# EAGLE board Control (EAGLE 9.5.2)
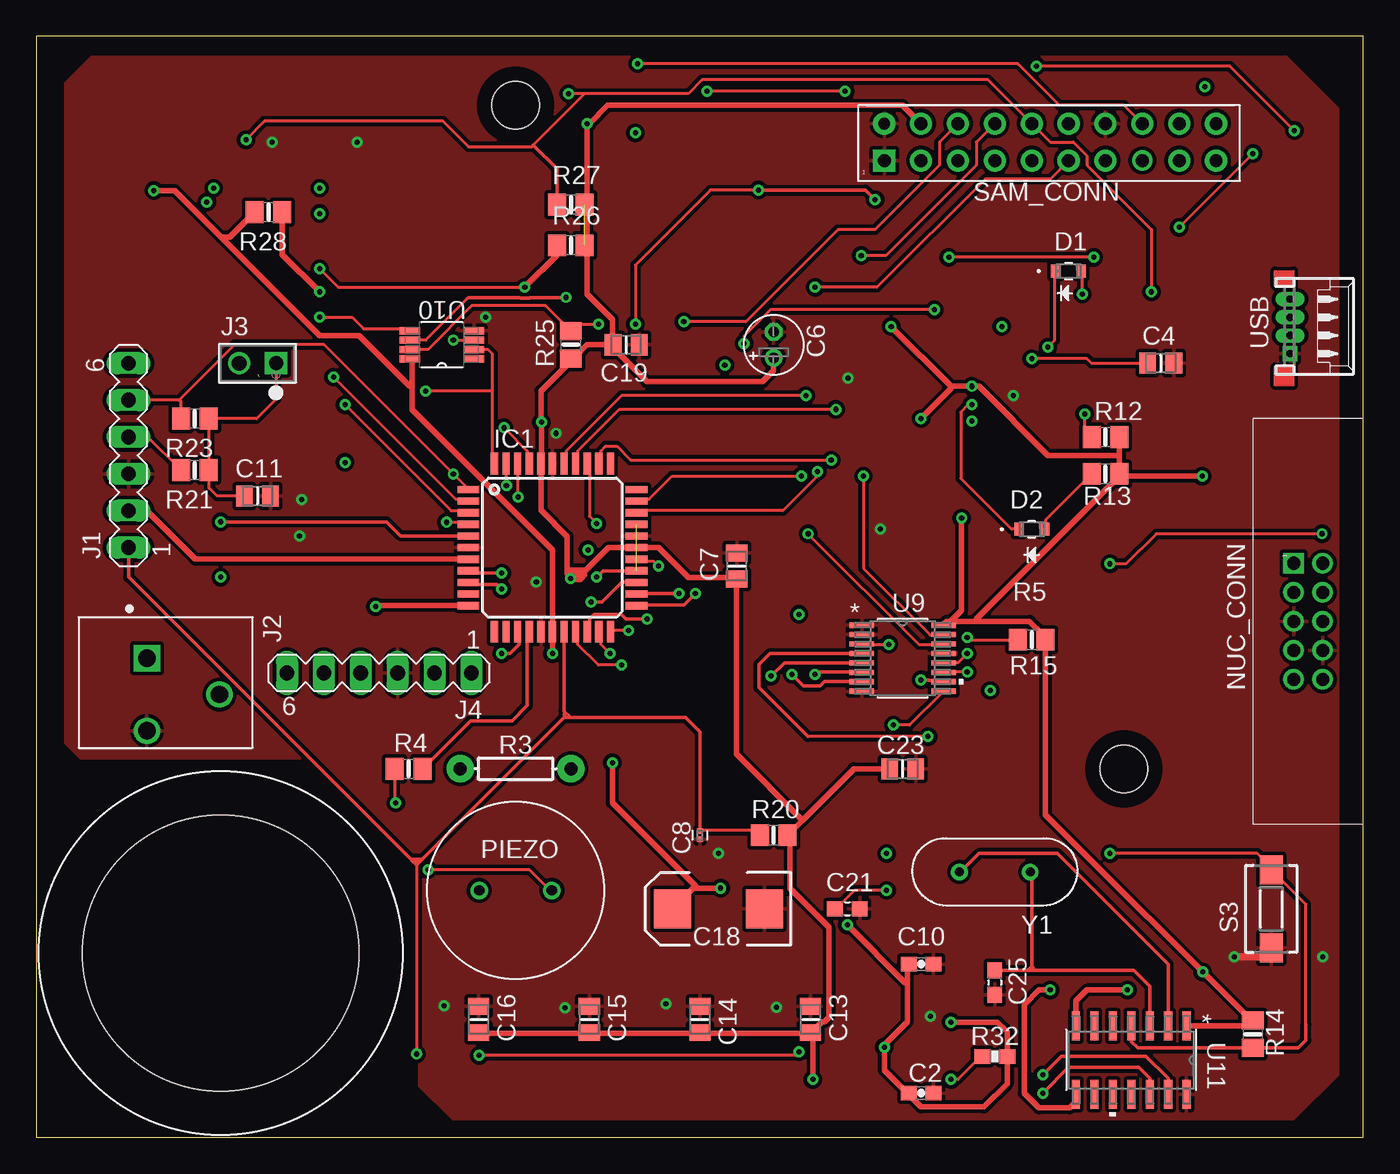
[diagram p0: board, top side]
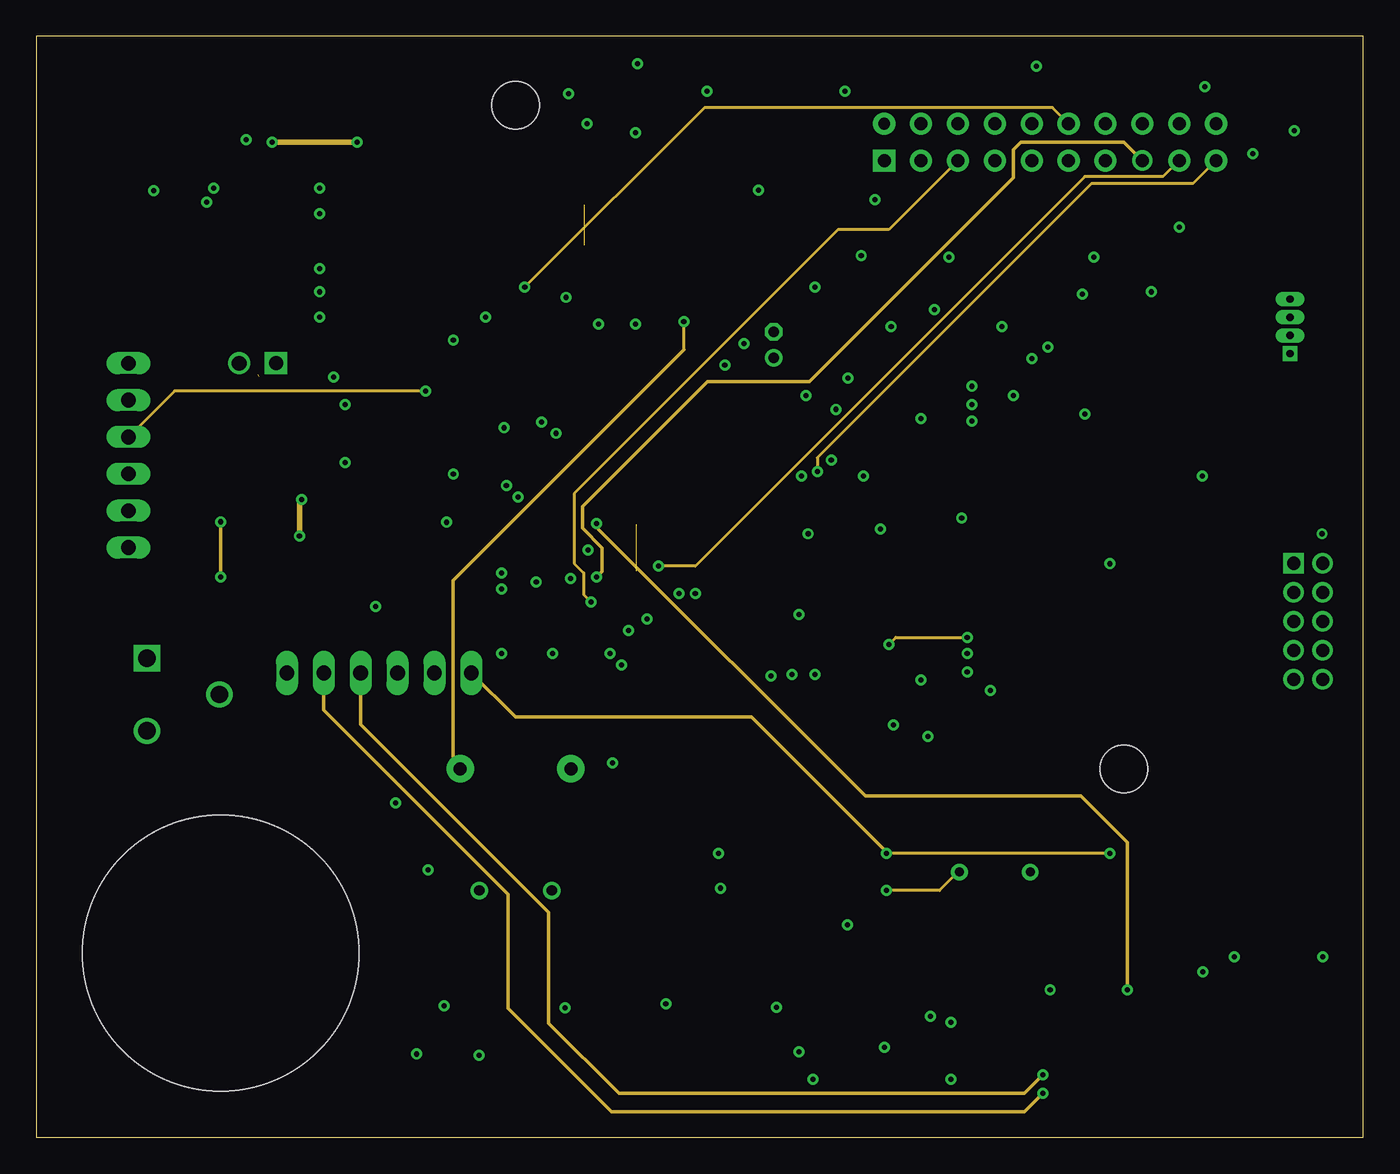
[diagram p1: board, inner layer Route2]
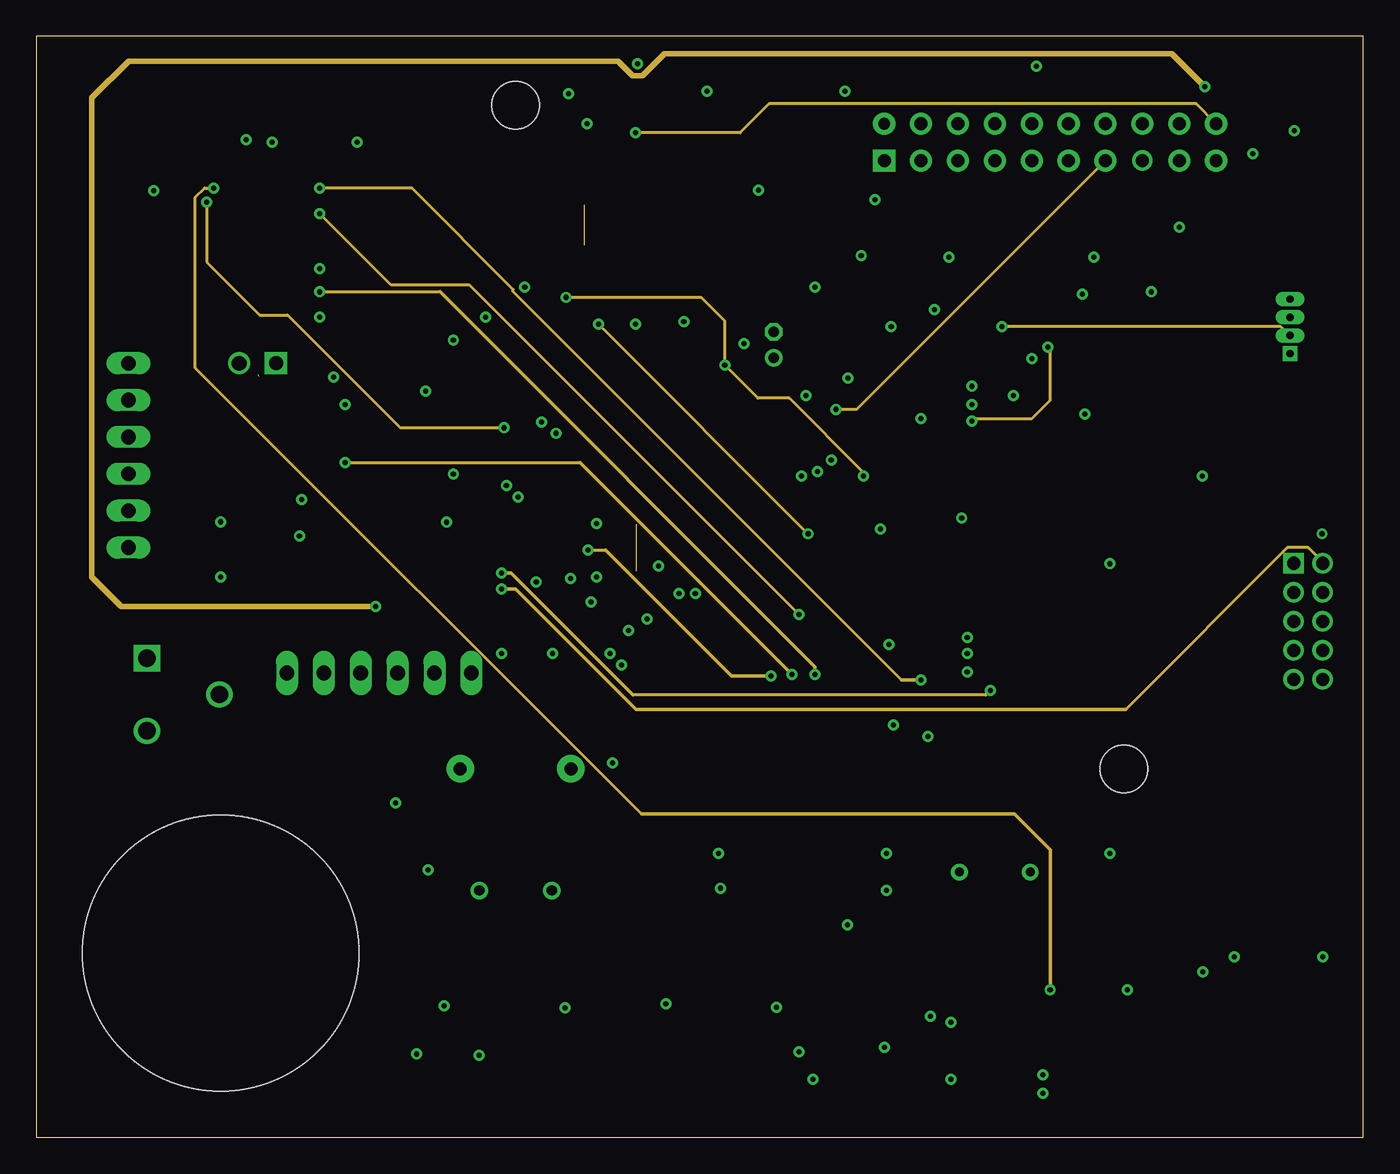
[diagram p2: board, inner layer Route15]
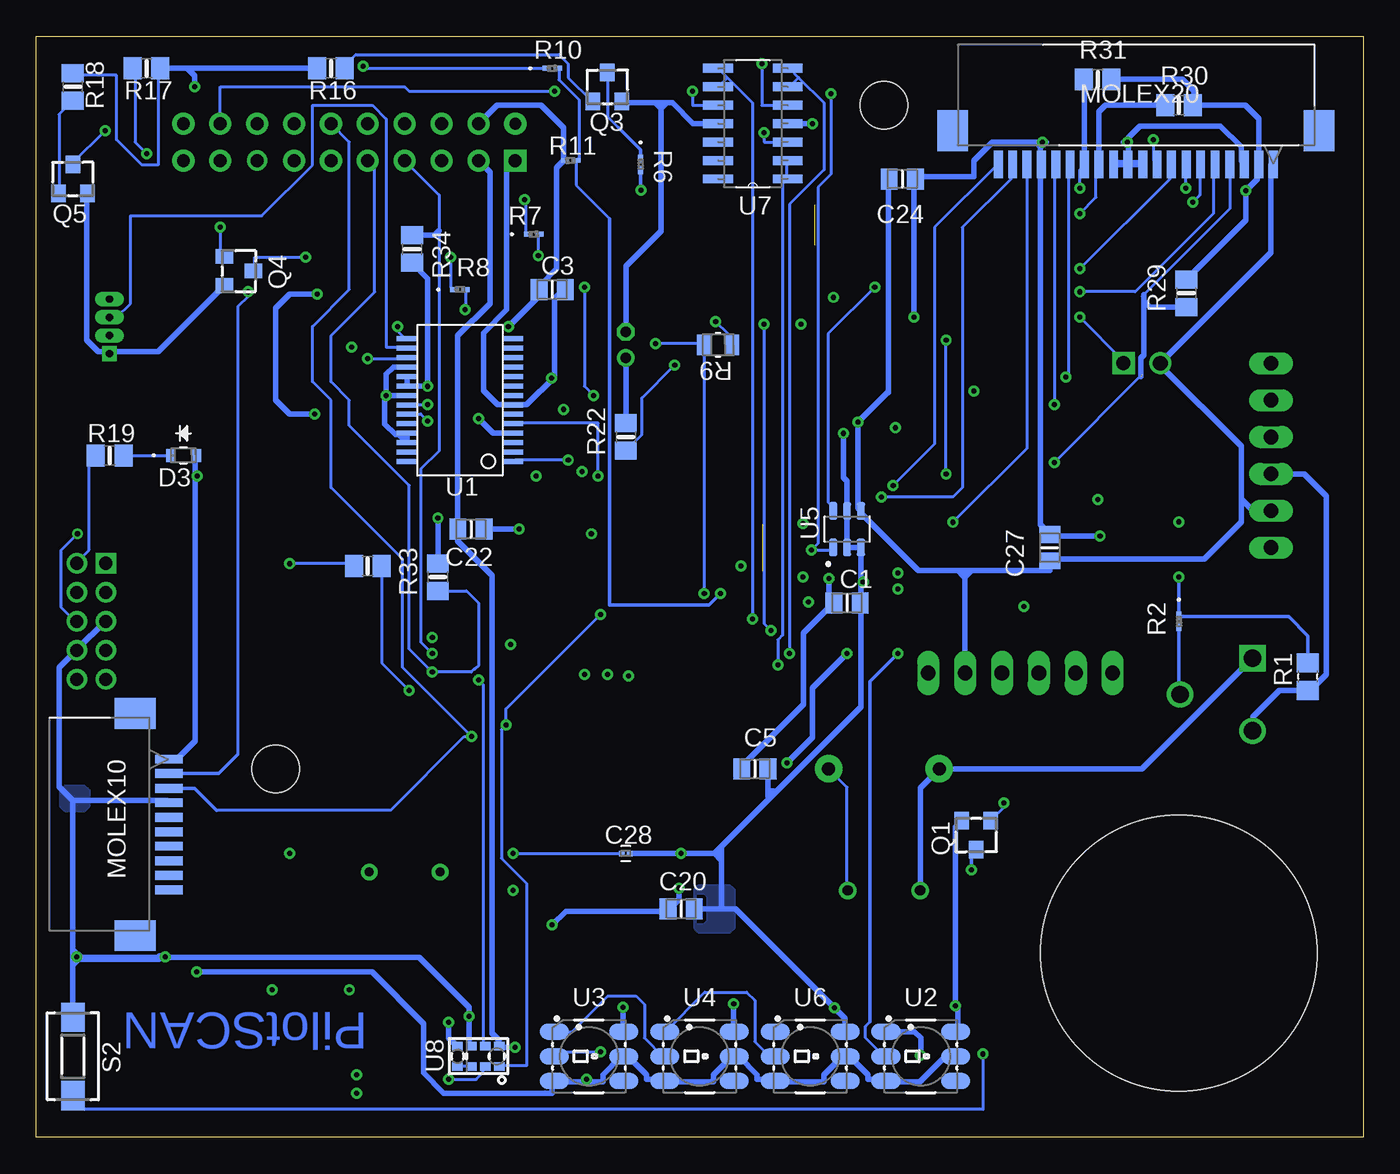
[diagram p3: board, bottom side, seen from below]

Size 91.42 x 75.87 mm. Coordinates in mm from the lower left corner, seen from the top.
Outline: 0,0 91.42,0 91.42,75.87 0,75.87 0,0
Copper layers (1+2*15+16): Top 0.035mm / dielectric 1.5mm / Route2 0.035mm / dielectric 0.15mm / Route15 0.035mm / dielectric 0.2mm / Bottom 0.035mm
Design rules "default *": minimum track width 6mil, minimum drill 0.35mm, track to track 6mil, track to pad 6mil, pad to pad 6mil, via to via 6mil, smd to smd 6mil, copper to edge 40mil, drill to drill 6mil, minimum pad ring 10mil, minimum via ring 8mil, stop-mask expansion 4mil, vias tented up to drill 0mil, thermal gap 10mil
Net classes: 0 default: width 0.203 mm, clearance 0.254 mm; 1 power: width 0.381 mm, clearance 0.254 mm
Holes 19.02 mm at 12.7,12.7
Holes 3.28 mm at 33.02,71.12 74.93,25.4

## Footprints (pad centres in the part's own frame; a part is rotated, then mirrored left to right if it is on the bottom)
PS1240P02BT = drill 0.7: P$1 -2.5,0; P$2 2.5,0
CAPC2012X140N = smd 1.15 x 1.45: 1 -0.9,0; 2 0.9,0
0603-CAP = smd 1.1 x 1: 1 -0.85,0; 2 0.85,0
E1,8-4 = drill 0.711 pad 1.168: + -0.889,0 | drill 0.711 pad 1.168 octagon: - 0.889,0
CL03A104KQ3NNNC = smd 0.38 x 0.4: 1 -0.281,0; 2 0.281,0
EIA7343 = smd 2.55 x 2.7: A 3.17,0; C -3.17,0
CAPC1608X90 = smd 1.1 x 1: 1 -0.85,0; 2 0.85,0
LED_VISHAY_TLMX1100 = smd 0.66 x 0.889: 1 -0.876,0; 2 0.876,0
TQFP44 = smd 1.5 x 0.5: 1 -5.8,4; 2 -5.8,3.2; 3 -5.8,2.4; 4 -5.8,1.6; 5 -5.8,0.8; 6 -5.8,0; 7 -5.8,-0.8; 8 -5.8,-1.6; 9 -5.8,-2.4; 10 -5.8,-3.2; 11 -5.8,-4; 23 5.8,-4; 24 5.8,-3.2; 25 5.8,-2.4; 26 5.8,-1.6; 27 5.8,-0.8; 28 5.8,0; 29 5.8,0.8; 30 5.8,1.6; 31 5.8,2.4; 32 5.8,3.2; 33 5.8,4 | smd 0.5 x 1.5: 12 -4,-5.8; 13 -3.2,-5.8; 14 -2.4,-5.8; 15 -1.6,-5.8; 16 -0.8,-5.8; 17 0,-5.8; 18 0.8,-5.8; 19 1.6,-5.8; 20 2.4,-5.8; 21 3.2,-5.8; 22 4,-5.8; 34 4,5.8; 35 3.2,5.8; 36 2.4,5.8; 37 1.6,5.8; 38 0.8,5.8; 39 0,5.8; 40 -0.8,5.8; 41 -1.6,5.8; 42 -2.4,5.8; 43 -3.2,5.8; 44 -4,5.8
MA06-1 = drill 1.016 long: 1 -6.35,0; 2 -3.81,0; 3 -1.27,0; 4 1.27,0; 5 3.81,0; 6 6.35,0
CONN_1-2834021-3 = drill 1.2 square: 1 0,0 | drill 1.2: 2 2.5,5; 3 5,0
77311-118-02LF = drill 0.965 pad 1.524 square: 1 2.54,0 | drill 1.016 pad 1.524: 2 0,0
522071060 = smd 0.61 x 1.905: 1 6.502,4.801; 2 5.512,4.801; 3 4.496,4.801; 4 3.505,4.801; 5 2.489,4.801; 6 1.499,4.801; 7 0.508,4.801; 8 -0.508,4.801; 9 -1.499,4.801; 10 -2.489,4.801 | smd 2.108 x 2.794: Z1 -5.642,7.137; Z2 9.652,7.137
XF3M(1)-2015-1B = smd 0.61 x 1.905: 1 6.502,4.801; 2 5.512,4.801; 3 4.496,4.801; 4 3.505,4.801; 5 2.489,4.801; 6 1.499,4.801; 7 0.508,4.801; 8 -0.508,4.801; 9 -1.499,4.801; 10 -2.489,4.801; 11 -3.505,4.801; 12 -4.496,4.801; 13 -5.512,4.801; 14 -6.502,4.801; 15 -7.493,4.801; 16 -8.484,4.801; 17 -9.474,4.801; 18 -10.465,4.801; 19 -11.455,4.801; 20 -12.446,4.801 | smd 2.108 x 2.794: 21 -15.596,7.137; 22 9.652,7.137
332-10 = drill 0.9 pad 1.27 square: 1 -4,-1 | drill 0.9 pad 1.27: 2 -4,1; 3 -2,-1; 4 -2,1; 5 0,-1; 6 0,1; 7 2,-1; 8 2,1; 9 4,-1; 10 4,1
MMBTA13LT3G = smd 1 x 1.2: A -1,-1; C 0,1; NC 1,-1
RESC2012X60 = smd 1.3 x 1.5: 1 -0.95,0; 2 0.95,0
RES_RC0201_P6XP3 = smd 0.559 x 0.33: 1 -0.394,0; 2 0.394,0
AXIAL-0.3 = drill 0.9 pad 1.88: P$1 -3.81,0; P$2 3.81,0
RMCF0805JT270R = smd 1.24 x 1.5: 1 -0.95,0; 2 0.95,0
RMCF0805FT1K00 = smd 1.24 x 1.5: 1 -0.95,0; 2 0.95,0
RES0805_CRG_TYCO = smd 0.965 x 1.397: 1 -0.953,0; 2 0.953,0
YAG_R0201 = smd 0.559 x 0.33: 1 -0.394,0; 2 0.394,0
RMCF0805FT2K20 = smd 1.24 x 1.5: 1 -0.95,0; 2 0.95,0
0603-RES = smd 1.1 x 1: 1 -0.85,0; 2 0.85,0
DTSM-3 = smd 2 x 1.6: 1 -2.7,0; 2 2.7,0
IPT1-110-01-L-D = drill 0.889 pad 1.524 square: P$1 -8.89,5.08 | drill 0.813 pad 1.524: P$2 -8.89,7.62 | drill 0.889 pad 1.524: P$3 -6.35,5.08; P$4 -6.35,7.62; P$5 -3.81,5.08; P$6 -3.81,7.62; P$7 -1.27,5.08; P$8 -1.27,7.62; P$9 1.27,5.08; P$10 1.27,7.62; P$11 3.81,5.08; P$12 3.81,7.62; P$13 6.35,5.08; P$14 6.35,7.62; P$16 8.89,7.62; P$17 11.43,5.08; P$18 11.43,7.62; P$19 13.97,5.08; P$20 13.97,7.62 | drill 0.889: P$15 8.89,5.08
SSOP28DB = smd 0.348 x 1.397: 1 -4.225,-3.656; 2 -3.575,-3.656; 3 -2.925,-3.656; 4 -2.275,-3.656; 5 -1.625,-3.656; 6 -0.975,-3.656; 7 -0.325,-3.656; 8 0.325,-3.656; 9 0.975,-3.656; 10 1.625,-3.656; 11 2.275,-3.656; 12 2.925,-3.656; 13 3.575,-3.656; 14 4.225,-3.656; 15 4.225,3.656; 16 3.575,3.656; 17 2.925,3.656; 18 2.275,3.656; 19 1.625,3.656; 20 0.975,3.656; 21 0.325,3.656; 22 -0.325,3.656; 23 -0.975,3.656; 24 -1.625,3.656; 25 -2.275,3.656; 26 -2.925,3.656; 27 -3.575,3.656; 28 -4.225,3.656
LED-TRICOLOR-5050-IC = smd 2 x 1.1: 1 -2.4,1.7; 2 -2.4,0; 3 -2.4,-1.7; 4 2.4,-1.7; 5 2.4,0; 6 2.4,1.7
TMP100NA/3K = smd 1.21 x 0.58: 1 -1.255,0.95; 2 -1.255,0; 3 -1.255,-0.95; 4 1.255,-0.95; 5 1.255,0; 6 1.255,0.95
SOIC127P600X175-14N = smd 2.057 x 0.61: 1 -4.801,7.62; 2 -4.801,6.35; 3 -4.801,5.08; 4 -4.801,3.81; 5 -4.801,2.54; 6 -4.801,1.27; 7 -4.801,0; 8 0,0; 9 0,1.27; 10 0,2.54; 11 0,3.81; 12 0,5.08; 13 0,6.35; 14 0,7.62
APDS-9960 = smd 0.6 x 0.72: 1 0.7,1.455; 2 0.7,0.485; 3 0.7,-0.485; 4 0.7,-1.455; 5 -0.7,-1.455; 6 -0.7,-0.485; 7 -0.7,0.485; 8 -0.7,1.455
PW16 = smd 1.676 x 0.356: 1 -2.819,2.275; 2 -2.819,1.625; 3 -2.819,0.975; 4 -2.819,0.325; 5 -2.819,-0.325; 6 -2.819,-0.975; 7 -2.819,-1.625; 8 -2.819,-2.275; 9 2.819,-2.275; 10 2.819,-1.625; 11 2.819,-0.975; 12 2.819,-0.325; 13 2.819,0.325; 14 2.819,0.975; 15 2.819,1.625; 16 2.819,2.275
SOP65P490X110-8N = smd 1.422 x 0.508: 1 -2.21,0.965; 2 -2.21,0.33; 3 -2.21,-0.33; 4 -2.21,-0.965; 5 2.21,-0.965; 6 2.21,-0.33; 7 2.21,0.33; 8 2.21,0.965
SOIC14-N_MC = smd 1.981 x 0.559: 1 -2.362,3.81; 2 -2.362,2.54; 3 -2.362,1.27; 4 -2.362,0; 5 -2.362,-1.27; 6 -2.362,-2.54; 7 -2.362,-3.81; 8 2.362,-3.81; 9 2.362,-2.54; 10 2.362,-1.27; 11 2.362,0; 12 2.362,1.27; 13 2.362,2.54; 14 2.362,3.81
0533980471 = drill 0.5 pad 1.016 square: 1 1.875,-1.25 | drill 0.5 pad 0.698 long: 2 0.625,-1.25; 3 -0.625,-1.25; 4 -1.875,-1.25
XTAL_ECS-10-13-1XH = drill 0.63 pad 1.03: 1 -2.44,0; 2 2.44,0

## Placement (x,y rotation side)
BUZZ1  PS1240P02BT  [PS1240P02BT]  33.02,17.02 0 top
C1  08056C104JAZ2A  [CAPC2012X140N]  35.56,36.83 0 bottom
C2  1.0uF  [0603-CAP]  60.96,3.05 0 top
C3  .1uF  [CAPC2012X140N]  55.88,58.42 0 bottom
C4  .1uF  [CAPC2012X140N]  77.47,53.34 0 top
C5  .1uF  [CAPC2012X140N]  41.91,25.4 0 bottom
C6  10uF  [E1,8-4]  50.8,54.61 90 top
C7  08056C104JAZ2A  [CAPC2012X140N]  48.26,39.37 90 top
C8  .01uF  [CL03A104KQ3NNNC]  45.72,20.83 270 top
C10  1.0uF  [0603-CAP]  60.96,11.94 0 top
C11  .1uF  [CAPC2012X140N]  15.24,44.2 0 top
C13  .1uF  [CAPC2012X140N]  53.34,8.13 90 top
C14  .1uF  [CAPC2012X140N]  45.72,8.13 90 top
C15  .1uF  [CAPC2012X140N]  38.1,8.13 90 top
C16  .1uF  [CAPC2012X140N]  30.48,8.13 90 top
C18  100uF  [EIA7343]  46.99,15.75 180 top
C19  08056C104JAZ2A  [CAPC2012X140N]  40.64,54.61 0 top
C20  08056C104JAZ2A  [CAPC2012X140N]  46.99,15.75 0 bottom
C21  C0603C150M8GACTU  [CAPC1608X90]  55.88,15.75 0 top
C22  08056C104JAZ2A  [CAPC2012X140N]  61.47,41.91 0 bottom
C23  08056C104JAZ2A  [CAPC2012X140N]  59.69,25.4 0 top
C24  08056C104JAZ2A  [CAPC2012X140N]  31.75,66.04 0 bottom
C25  C0603C150M8GACTU  [CAPC1608X90]  66.04,10.67 270 top
C27  08056C104JAZ2A  [CAPC2012X140N]  21.59,40.64 90 bottom
C28  .01uF  [CL03A104KQ3NNNC]  50.8,19.56 0 bottom
D1  TLMS1100-GS08  [LED_VISHAY_TLMX1100]  71.12,59.69 0 top
D2  TLMS1100-GS08  [LED_VISHAY_TLMX1100]  68.58,41.91 0 top
D3  TLMS1100-GS08  [LED_VISHAY_TLMX1100]  81.28,46.99 0 bottom
IC1  DSPIC30F4011/PT  [TQFP44]  35.56,40.64 0 top
J1  Prog  [MA06-1]  6.35,46.99 90 top
J2  1-2834021-3  [CONN_1-2834021-3]  7.62,33.02 270 top
J3  77311-118-02LF  [77311-118-02LF]  13.97,53.34 0 top
J4  Prog  [MA06-1]  23.62,32 180 top
MOLEX10  522071060  [522071060]  77.47,19.56 90 bottom
MOLEX20  XF3M(1)-2015-1B  [XF3M(1)-2015-1B]  12.7,62.23 0 bottom
NUC_CONN  EHT-105-01-S-D  [332-10]  87.63,35.56 270 top
Q1  MMBTA13LT3G  [MMBTA13LT3G]  26.67,20.83 180 bottom
Q3  MMBTA13LT3G  [MMBTA13LT3G]  52.07,72.39 0 bottom
Q4  MMBTA13LT3G  [MMBTA13LT3G]  77.47,59.69 270 bottom
Q5  MMBTA13LT3G  [MMBTA13LT3G]  88.9,66.04 0 bottom
R1  5K  [RESC2012X60]  3.81,31.75 90 bottom
R2  6K8  [RES_RC0201_P6XP3]  12.7,35.56 270 bottom
R3  1K  [AXIAL-0.3]  33.02,25.4 180 top
R4  100  [RMCF0805JT270R]  25.65,25.4 0 top
R5  1K  [RMCF0805FT1K00]  68.58,39.37 180 bottom
R6  1K8  [RES_RC0201_P6XP3]  49.78,67.06 270 bottom
R7  18K  [RES_RC0201_P6XP3]  57.15,62.23 0 bottom
R8  1K8  [RES_RC0201_P6XP3]  62.23,58.42 0 bottom
R9  8K2  [RES0805_CRG_TYCO]  44.45,54.61 0 bottom
R10  1K8  [RES_RC0201_P6XP3]  55.88,73.66 0 bottom
R11  1K5  [YAG_R0201]  54.61,67.31 180 bottom
R12  270  [RMCF0805JT270R]  73.66,48.26 0 top
R13  270  [RMCF0805JT270R]  73.66,45.72 0 top
R14  1K  [RMCF0805FT1K00]  83.82,7.11 90 top
R15  RMCF0805FT2K20  [RMCF0805FT2K20]  68.58,34.29 0 top
R16  1K  [RMCF0805FT1K00]  71.12,73.66 0 bottom
R17  1K  [RMCF0805FT1K00]  83.82,73.66 180 bottom
R18  1K  [RMCF0805FT1K00]  88.9,72.39 270 bottom
R19  270  [RMCF0805JT270R]  86.36,46.99 180 bottom
R20  1K  [RMCF0805FT1K00]  50.8,20.83 0 top
R21  RMCF0805FT2K20  [RMCF0805FT2K20]  10.92,45.97 180 top
R22  RMCF0805FT2K20  [RMCF0805FT2K20]  50.8,48.26 90 bottom
R23  RMCF0805FT2K20  [RMCF0805FT2K20]  10.92,49.53 180 top
R25  RMCF0805FT2K20  [RMCF0805FT2K20]  36.83,54.61 270 top
R26  RMCF0805FT2K20  [RMCF0805FT2K20]  36.83,61.47 0 top
R27  RMCF0805FT2K20  [RMCF0805FT2K20]  36.83,64.26 0 top
R28  RMCF0805FT2K20  [RMCF0805FT2K20]  16,63.75 180 top
R29  RMCF0805FT2K20  [RMCF0805FT2K20]  12.19,58.17 90 bottom
R30  RMCF0805FT2K20  [RMCF0805FT2K20]  12.7,71.12 0 bottom
R31  RMCF0805FT2K20  [RMCF0805FT2K20]  18.29,72.9 0 bottom
R32  1.1k  [0603-RES]  66.04,5.59 0 top
R33  RMCF0805FT2K20  [RMCF0805FT2K20]  63.75,38.61 90 bottom
R34  RMCF0805FT2K20  [RMCF0805FT2K20]  65.53,61.21 270 bottom
S2  DTSM-3  [DTSM-3]  88.9,5.59 270 bottom
S3  DTSM-3  [DTSM-3]  85.09,15.75 90 top
SAM_CONN  IPT1-110-01-L-D  [IPT1-110-01-L-D]  67.31,62.23 0 top
U1  FT232R  [SSOP28DB]  62.23,50.8 90 bottom
U2  WS2812  [LED-TRICOLOR-5050-IC]  30.48,5.59 0 bottom
U3  WS2812  [LED-TRICOLOR-5050-IC]  53.34,5.59 0 bottom
U4  WS2812  [LED-TRICOLOR-5050-IC]  45.72,5.59 0 bottom
U5  TMP100NA/3K  [TMP100NA/3K]  35.56,41.91 90 bottom
U6  WS2812  [LED-TRICOLOR-5050-IC]  38.1,5.59 0 bottom
U7  LM324DR  [SOIC127P600X175-14N]  44.45,73.66 180 bottom
U8  APDS-9960  [APDS-9960]  60.96,5.59 270 bottom
U9  TCA9546APWR  [PW16]  59.69,33.02 0 top
U10  PCA9515ADP,118  [SOP65P490X110-8N]  27.94,54.61 180 top
U11  PIC16F506-I/SL  [SOIC14-N_MC]  75.44,5.33 270 top
USB  0533980471  [0533980471]  87.63,55.88 270 top
Y1  ECS-10-13-1XH  [XTAL_ECS-10-13-1XH]  66.04,18.29 180 top

## Library data of the parts
BUZZ1 = PS1240P02BT; AVAILABILITY: Unavailable; DESCRIPTION: Audio Buzzer Piezo 30Vo-p 3Vo-p 70dBA Pin Through Hole T/R; MF: TDK; MP: PS1240P02BT; PACKAGE: 2020 TDK; PRICE: None
C1 C3-C5 C7 C11 C13-C16 C19 C20 C22-C24 C27 = 08056C104JAZ2A; AVAILABILITY: Unavailable; DESCRIPTION: 0805 100 nF 6.3 V ±5 % Tolerance X7R SMT Multilayer Ceramic Capacitor; MF: AVX; MP: 08056C104JAZ2A; PACKAGE: 0805 AVX; PRICE: None
C2 C10 = SparkFun-Capacitors; PROD_ID: CAP-00868
C6 = resistor
C8 C28 = CL03A104KQ3NNNC
C18 = SparkFun-Capacitors; PROD_ID: CAP-07890
C21 C25 = C0603C150M8GACTU; DESCRIPTION: Cap Ceramic 15pF 10V C0G 20% SMD 0603 Paper T/R; DIGI-KEY_PART_NUMBER: 399-9005-1-ND; DIGI-KEY_PURCHASE_URL: https://www.digikey.com/product-detail/en/kemet/C0603C150M8GACTU/399-9005-1-ND/3522522?utm_source=snapeda&utm_medium=aggregator&utm_campaign=symbol; MF: KEMET; MP: C0603C150M8GACTU; PACKAGE: 0603 Kemet
D1-D3 = TLMS1100-GS08; MANUFACTURER_PART_NUMBER: TLMS1100GS08; VENDOR: Vishay
IC1 = microchip-dspic
J1 J4 = con-lstb; OC_FARNELL: unknown; OC_NEWARK: unknown
J2 = 1-2834021-3; COMMENT: 1-2834021-3; DESCRIPTION: Conn PC Terminal Block RCP 3 POS 2.5mm Solder ST Thru-Hole 5A/Contact Box/Carton; DIGI-KEY_PART_NUMBER: A123845-ND; DIGI-KEY_PURCHASE_URL: https://www.digikey.com/product-detail/en/te-connectivity-amp-connectors/1-2834021-3/A123845-ND/5872961?utm_source=snapeda&utm_medium=aggregator&utm_campaign=symbol; MF: TE Connectivity; MP: 1-2834021-3; PACKAGE: None; TE_PURCHASE_URL: https://www.te.com/usa-en/product-1-2834021-3.html?te_bu=Cor&te_type=disp&te_campaign=seda_glo_cor-seda-global-disp-prtnr-fy19-seda-model-bom-cta_sma-317_1&elqCampaignId=32493
J3 = 77311-118-02LF; MANUFACTURER_PART_NUMBER: 7731111802LF; VENDOR: Amphenol FCI
MOLEX10 = 522071060; AVAILABILITY: Unavailable; DESCRIPTION: 1.00mm FFC/FPC Connectors HSG ASSY ZIF SMT 14P; MF: Molex; MP: 52207-1485; PACKAGE: None; PRICE: None
MOLEX20 = XF3M(1)-2015-1B; AVAILABILITY: Unavailable; DESCRIPTION: 1.00mm FFC/FPC Connectors HSG ASSY ZIF SMT 14P; MF: Molex; MP: 52207-1485; PACKAGE: None; PRICE: None
NUC_CONN = EHT-105-01-S-D
Q1 Q3-Q5 = MMBTA13LT3G
R1 = CRCW08055K00FKTA
R2 = RC0201FR-076K8L
R3 = SparkFun-Resistors
R4 R12 R13 R19 = RMCF0805JT270R
R5 R14 R16-R18 R20 = RMCF0805FT1K00
R6 R8 R10 = RC0201JR-071K8L
R7 = RMCF0603JT18K0
R9 = CRG0805F8K2
R11 = RC0201JR-071K5L
R15 R21-R23 R25-R31 R33 R34 = RMCF0805FT2K20
R32 = SparkFun-Resistors; PROD_ID: RES-00824
S2 S3 = switch-tact
SAM_CONN = IPT-110-01-L-D
U1 = SparkFun
U2-U4 U6 = SparkFun-LED; PROD_ID: DIO-11598
U5 = TMP100NA_3K; AVAILABILITY: Unavailable; DESCRIPTION: Temperature Sensor with I2C/SMBus Interface in SOT-23 6-SOT-23 -55 to 125; MF: Texas Instruments; MP: TMP100NA/3K; PACKAGE: SOT-23 Texas Instruments; PRICE: None
U7 = LM324DR; AVAILABILITY: Unavailable; DESCRIPTION: Quadruple Operational Amplifier 14-SOIC 0 to 70; MF: Texas Instruments; MP: LM324DR; PACKAGE: SOIC-14 Texas Instruments; PRICE: None; SPICEPREFIX: X
U8 = SparkFun-Sensors; PROD_ID: SEN-12005
U9 = TCA9546A; MANUFACTURER_PART_NUMBER: TCA9546APWR; VENDOR: Texas Instruments
U10 = PCA9515ADP; AVAILABILITY: Unavailable; DESCRIPTION: PCA9515A Series 2-Channel Bidirectional Buffer I2C-bus repeater - TSSOP - 8; MF: NXP USA; MP: PCA9515ADP,118; PACKAGE: TSSOP-8 NXP Semiconductors; PRICE: None
U11 = PIC16F506; MANUFACTURER_PART_NUMBER: PIC16F506ISL; VENDOR: Microchip
USB = 0533980471
Y1 = ECS-10-13-1XH; DESCRIPTION: Crystal 1MHz ±30ppm _Tol_ ±25ppm _Stability_ 13pF FUND 30Ohm 2-Pin HC-49/U Thru-Hole Bulk; DIGI-KEY_PART_NUMBER: X999-ND; DIGI-KEY_PURCHASE_URL: https://www.digikey.com/product-detail/en/ecs-inc/ECS-10-13-1XH/X999-ND/827491?utm_source=snapeda&utm_medium=aggregator&utm_campaign=symbol; MF: ECS Inc.; MP: ECS-10-13-1XH; PACKAGE: HC-49/U ECS International

## Nets
+3V3 [power]: C2.1 C10.1 C18.A C20.1 C22.1 IC1.17 MOLEX20.2 R28.2 R29.2 R30.2 R31.2 R32.2 SAM_CONN.P$3 U8.5 U8.8 U10.8
+5V [power]: C1.1 C3.1 C5.1 C6.+ C7.1 C13.1 C14.1 C15.1 C16.1 C19.1 C23.1 C24.1 C27.1 D3.2 IC1.7 IC1.28 IC1.40 J1.2 J3.2 J4.2 MOLEX10.1 MOLEX20.1 R11.2 R12.2 R13.2 R14.2 R15.2 R20.2 R22.2 R25.2 R26.2 R27.2 R33.2 R34.2 SAM_CONN.P$4 U1.4 U1.19 U1.20 U2.3 U2.5 U3.3 U3.5 U4.3 U4.5 U5.4 U6.3 U6.5 U7.4 U9.16 U11.1
+12V: BUZZ1.P$1 J2.1 R3.P$2 R9.2 SAM_CONN.P$6
+24V: R7.2 SAM_CONN.P$8
AN3: IC1.22 R6.2 R7.1
AN4: IC1.23 R8.2 R9.1
AN5: IC1.24 R10.2 R11.1
CAP_B: IC1.5 R1.2 R2.1
DIPSW1: C11.1 J3.1 R21.1 R23.1 U10.5
DOUT: IC1.41 MOLEX20.6
EN12: IC1.27 SAM_CONN.P$17
EN_AN: IC1.11 R16.1 R17.1 R18.1
EN_VBAT: IC1.31 SAM_CONN.P$19
ESRDTFYGHUJI: Q4.C R8.1
FAN_A: IC1.37 SAM_CONN.P$13
FAN_B: IC1.38 SAM_CONN.P$11
GND [power]: C1.2 C2.2 C3.2 C4.2 C5.2 C6.- C7.2 C8.2 C10.2 C11.2 C13.2 C14.2 C15.2 C16.2 C18.C C19.2 C20.2 C21.2 C22.2 C23.2 C24.2 C25.2 C27.2 C28.2 IC1.6 IC1.16 IC1.29 IC1.39 J1.3 J2.3 J4.3 MOLEX10.4 MOLEX20.3 MOLEX20.10 MOLEX20.11 MOLEX20.12 MOLEX20.17 NUC_CONN.5 NUC_CONN.8 Q1.NC Q3.NC Q4.NC Q5.NC R1.1 S2.1 S3.1 SAM_CONN.P$1 SAM_CONN.P$2 SAM_CONN.P$14 U1.7 U1.18 U1.21 U1.25 U1.26 U2.6 U3.6 U4.6 U5.2 U5.3 U5.5 U6.6 U7.11 U8.6 U9.1 U9.2 U9.8 U9.13 U10.4 U11.14 USB.1
GP_OUT: IC1.3 MOLEX20.16
HDD_LED#: NUC_CONN.3
HDD_POWER_LED: NUC_CONN.1
I5: IC1.19 U7.1 U7.2
I5M: SAM_CONN.P$20 U7.3
I12: IC1.20 U7.8 U7.9
I12M: SAM_CONN.P$18 U7.10
I24: IC1.21 U7.6 U7.7
I24M: SAM_CONN.P$16 U7.5
ICSPCLK: J4.5 U11.12
ICSPDAT: J4.4 U11.13
INT: R32.1 U8.2
INT_LUZ: IC1.2 MOLEX20.15
LED1: IC1.42 MOLEX20.19
LED2: IC1.43 MOLEX20.20
LVP: J4.6
MCLK: MOLEX20.7 U11.8
MCLR: C8.1 IC1.18 J1.1 R20.1 S2.2
MCLR_2: C28.1 J4.1 R14.1 S3.2 U11.4
N$1: D1.2 R12.1
N$2: IC1.26 IC1.30 SAM_CONN.P$15
N$3: U1.11
N$4: C4.1 U1.17
N$5: D2.2 R13.1
N$6: D3.1 R19.1
N$7: Q1.A R4.1
N$8: BUZZ1.P$2 Q1.C R3.P$1
N$9: U1.15 USB.2
N$10: J2.2 R2.2
N$11: Q3.A R16.2
N$12: U8.3 U8.4
N$13: U1.16 USB.3
N$16: MOLEX10.7
N$17: MOLEX10.8
N$18: MOLEX10.9
N$19: MOLEX10.10
N$27: U1.3
N$28: C21.1 U11.2 Y1.2
N$29: C25.1 U11.3 Y1.1
N$31: R15.1 U9.3
N$37: Q3.C R6.1
N$38: Q4.A R17.2
N$39: Q5.C R10.1
N$40: Q5.A R18.2
N$42: U1.2
N$43: U1.14
N$44: U1.13
N$45: U1.12
N$46: U1.27
N$47: U2.1 U3.2
N$48: U3.1 U4.2
N$49: U4.1 U6.2
N$50: U1.28
N$51: U1.10
N$52: U1.9
N$53: U1.6
NUC_SW: IC1.8 R5.1
POW_SW: NUC_CONN.6 R5.2
POWER_LED_ALT: NUC_CONN.4
POWER_LED_MAIN: IC1.9 NUC_CONN.2 R19.2
RESET_SWITCH#: NUC_CONN.7
RF2: IC1.1 J1.5 R23.2 U10.3
RF3: IC1.44 J1.4 R21.2 U10.2
RGB_LED: IC1.14 U2.2
RX1: IC1.35 U1.1
RXLED: D2.1 U1.22
SCL: R25.1 U9.14 U10.7
SCL0: MOLEX10.2 MOLEX20.9 R27.1 SAM_CONN.P$10 U5.1 U9.5
SCL1: MOLEX20.4 R29.1 U9.7
SCL2: MOLEX20.14 R31.1 U8.7 U9.10
SCL3: R34.1 SAM_CONN.P$7 U9.12
SDA: R22.1 U9.15 U10.6
SDA0: MOLEX10.3 MOLEX20.8 R26.1 SAM_CONN.P$12 U5.6 U9.4
SDA1: MOLEX20.5 R28.1 U9.6
SDA2: MOLEX20.13 R30.1 U8.1 U9.9
SDA3: R33.1 SAM_CONN.P$9 U9.11
SPEAKER: IC1.15 R4.2
TRIGGER_IN+: IC1.4 MOLEX20.18
TX1: IC1.32 U1.5
TXLED: D1.1 U1.23
VBAT: IC1.25 SAM_CONN.P$5
WAKE_UP: IC1.36 U11.7

## Tracks (layer width: path | path; a pad name or v marks a point on that pad's centre or on a via)
+3V3  (via drill 0.35)
  Top 0.381: 25.88,51.75 25.88,50.17 35.56,40.48 IC1.17 v35.56,33.34 | 25.88,51.75 25.88,53.5 U10.8 | v8.1,65.25 9.53,65.25 12.75,62.02 | 12.75,62.02 19.53,55.25 22.22,55.25 25.72,51.75 25.88,51.75 | 45.56,17.18 45.4,17.18 45.4,17.33 | 45.56,17.18 v47.15,17.18 | 43.97,15.75 C18.A 45.4,17.33 | 60.01,10.67 60.01,7.97 58.42,6.38 v58.42,6.22 58.42,4.64 60.01,3.05 C2.1 60.17,2.89 60.96,2.1 65.28,2.1 66.89,3.71 R32.2 66.89,7.28 66.23,7.94 v63.02,7.94 | 60.01,10.67 60.01,11.94 C10.1 | v55.88,14.64 59.85,10.67 60.01,10.67 | v39.69,25.81 39.69,23.05 45.4,17.34 | 45.4,17.33 45.4,17.34 | 45.4,17.34 45.56,17.18 | R28.2 13.32,62.02 12.75,62.02
  Bottom 0.381: SAM_CONN.P$3 60.17,66.52 60.17,57.47 62.39,55.25 62.39,41.93 C22.1 62.37,41.13 62.39,41.12 62.39,41.09 60.01,38.7 60.01,7.18 59.53,6.7 59.53,6.38 U8.8 59.37,6.22 v58.42,6.22 | v47.15,17.18 47.15,16.38 47.78,15.75 C20.1 47.94,15.59 54.93,15.59 v55.88,14.64 | v63.02,7.94 63.02,6.86 62.55,6.38 U8.5 | v35.56,33.34 37.94,30.96 37.94,27.56 v39.69,25.81 | R29.2 8.1,63.21 v8.1,65.25 7.3,66.04 7.3,66.99 MOLEX20.2 7.19,70.18 8.13,71.12 R30.2 11.68,71.19 11.68,72.14 12.45,72.9 R31.2
+5V  (via drill 0.35)  (1 unrouted)
  Top 0.381: 74.61,46.99 R12.2 | 74.61,46.99 R13.2 | 74.61,46.99 69.69,46.99 64.93,51.75 v64.45,51.75 63.02,51.75 | 62.99,35.56 62.71,35.56 62.55,35.4 U9.16 | 62.99,35.56 64.77,35.56 | 64.77,35.56 68.42,35.56 69.37,34.61 69.37,34.29 R15.2 69.53,34.13 69.53,22.22 83.69,8.06 R14.2 83.45,7.7 U11.1 | R13.2 74.61,45.56 64.77,35.72 64.77,35.56 | v80.33,45.56 74.77,45.56 R13.2 | J1.2 7.62,43.18 10.95,39.85 29.69,39.85 IC1.7 | C16.1 30.48,7.18 38.1,7.18 C15.1 38.26,7.18 45.72,7.18 C14.1 45.88,7.18 53.34,7.18 C13.1 | C23.1 56.32,25.4 52.78,21.86 | 52.78,21.86 R20.2 51.91,20.83 51.91,17.18 54.61,14.48 54.61,8.29 54.29,7.97 54.13,7.97 53.5,7.33 C13.1 | 48.23,38.58 44.93,38.58 42.86,40.64 IC1.28 39.43,40.64 37.88,39.08 | 48.23,38.58 48.26,38.58 C7.1 | C19.1 37.94,54.61 37.15,53.82 36.83,53.82 R25.2 36.83,53.5 34.77,51.44 34.77,49.31 v34.8,49.28 34.8,46.48 IC1.40 34.76,43.22 36.58,41.4 36.58,39.12 | 37.94,61.63 37.94,58.1 39.69,56.36 39.69,54.77 C19.1 | 37.94,61.63 v37.94,69.85 38.1,69.85 39.37,71.12 59.69,71.12 SAM_CONN.P$4 | C6.+ 50.8,52.83 50.04,52.07 42.07,52.07 39.69,54.45 C19.1 | 52.78,21.86 48.23,26.42 48.23,38.58 | v53.5,4 53.5,7.18 C13.1 | v58.9,55.88 63.02,51.75 | v60.96,49.53 63.02,51.59 63.02,51.75 | 36.83,38.55 v36.8,38.51 | v36.8,38.51 36.99,38.7 36.96,38.73 | 37.53,38.73 37.88,39.08 | 36.58,39.12 36.58,38.86 36.8,38.64 v36.8,38.51 | 36.61,39.08 36.96,38.73 | 37.24,38.45 37.5,38.45 37.78,38.73 37.53,38.73 | 37.53,38.73 36.96,38.73 | 37.88,39.08 36.61,39.08 | 36.61,39.08 36.58,39.12 | R26.2 37.94,61.63 | v63.75,42.67 63.75,36.32 62.99,35.56
  Bottom 0.381: 80.49,45.56 80.49,27.31 81.62,26.17 MOLEX10.1 | 80.49,45.56 80.49,46.99 D3.2 | U1.19 65.88,52.39 65.88,51.91 U1.20 65.72,51.75 v64.45,51.75 64.45,59.18 R34.2 | v80.33,45.56 80.49,45.56 | 26.99,39.05 21.59,39.05 C27.1 21.43,39.85 10.95,39.85 8.41,42.39 8.41,43.97 | 26.99,39.05 27.43,39.05 | 27.43,39.05 27.94,39.05 | 27.94,39.05 30.64,39.05 34.61,43.02 U5.4 34.8,43.35 v34.8,49.28 32.77,51.31 32.7,51.31 32.7,66.04 C24.1 | MOLEX20.1 6.35,66.99 6.35,60.96 J3.2 13.97,53.18 8.41,47.62 8.41,43.97 | 8.41,43.97 7.62,43.18 J1.2 | v80.36,11.4 68.29,11.4 64.74,7.84 64.74,4.45 63.34,3.05 55.88,3.05 55.88,3.84 U3.3 55.56,3.84 53.5,3.84 | U2.5 28.8,5.59 30.54,3.84 32.7,3.84 U2.3 33.02,4 34.13,4 34.13,4.32 35.4,5.59 U6.5 35.88,5.59 37.15,4.32 37.15,3.84 40.32,3.84 U6.3 40.64,4 41.75,4 41.75,4.32 43.02,5.59 U4.5 43.5,5.59 44.77,4.32 44.77,3.84 47.94,3.84 U4.3 48.26,4 49.37,4 49.37,4.32 50.64,5.59 U3.5 51.12,5.59 52.39,4.32 52.39,3.84 53.5,3.84 | SAM_CONN.P$4 59.69,71.12 56.64,71.12 55.09,69.56 55.09,67.47 R11.2 55.09,67.31 55.56,66.83 55.56,59.85 56.67,58.74 56.67,58.42 C3.1 56.83,58.26 56.83,57.94 v58.9,55.88 | C5.1 42.7,25.4 42.7,25.72 38.58,29.85 38.58,34.77 36.51,36.83 C1.1 36.51,36.99 36.8,37.27 v36.8,38.51 | C6.+ R22.2 | v37.94,69.85 U7.4 | v53.5,4 53.5,3.84 | U1.4 59.96,48.53 v60.96,49.53 | J4.2 27.43,38.61 | 27.43,39.05 27.43,38.61 | 26.99,39.05 27.43,38.61 | 27.43,38.61 27.5,38.61 27.94,39.05 | R33.2 v63.75,42.67
+12V  (via drill 0.35)
  Top 0.203: v44.61,56.2 48.9,56.2 55.25,62.55 57.79,62.55 62.23,66.99 62.23,68.58 SAM_CONN.P$6
  Route2 0.203: 44.61,54.29 v44.61,56.2
  Route2 0.254: 44.61,54.29 28.7,38.39 28.7,25.91 R3.P$2
  Bottom 0.203: R9.2 43.82,54.93 43.82,55.4 v44.61,56.2
  Bottom 0.381: J2.1 15.24,25.4 R3.P$2 30.52,24.09 BUZZ1.P$1
+24V  (via drill 0.35)
  Top 0.203: v56.83,60.77 58.55,60.77 64.77,66.99 64.77,68.58 SAM_CONN.P$8
  Bottom 0.203: v56.83,60.77 56.83,62.23 R7.2
AN3  (via drill 0.35)
  Top 0.203: v40.8,34.92 39.69,34.92 IC1.22 | v49.75,65.28 46.45,65.28 41.28,60.1 v41.28,56.04
  Top 0.254: v49.75,65.28 57.12,65.28 v57.79,64.61
  Bottom 0.203: v49.75,65.28 49.78,65.25 | v57.79,64.61 57.72,64.61 57.72,62.41 R7.1 | v40.8,34.92 41.28,35.4 v41.28,56.04
  Bottom 0.254: R6.2 49.78,65.31 v49.75,65.28
AN4  (via drill 0.35)
  Top 0.203: v61.88,57.02 50.58,57.02 48.77,55.21 v48.77,54.7 | 41.43,36.67 IC1.23
  Top 0.254: 41.43,36.67 44.61,36.67 v45.4,37.47
  Bottom 0.203: R8.2 61.84,57.07 v61.88,57.02 | v48.77,54.7 45.4,54.7 R9.1 v45.4,37.47
AN5  (via drill 0.35)
  Top 0.203: 41.43,37.47 IC1.24
  Top 0.254: v44.29,37.47 41.43,37.47
  Bottom 0.203: R10.2 55.4,73.66 55.4,72.87 54.04,71.5 54.04,67.49 R11.1 54.22,65.62 51.91,63.31
  Bottom 0.254: v44.29,37.47 45.09,36.67 51.91,36.67 51.91,63.31
CAP_B  (via drill 0.35)
  Top 0.254: IC1.5 25.11,41.44 24.13,42.42 v12.7,42.42
  Route2 0.254: v12.7,38.61 v12.7,42.42
  Bottom 0.203: 12.7,35.88 R2.1
  Bottom 0.254: R1.2 3.81,34.54 5.14,35.88 12.7,35.88 | R2.1 v12.7,38.61 12.7,38.86
DIPSW1  (via drill 0.35)
  Top 0.203: U10.5 25.72,55.72 22.54,55.72 21.75,56.52 v19.53,56.52 | J3.1 16.51,50.87 15.17,49.53 R23.1 11.9,49.56 11.9,46.01 | R21.1 11.9,46.01 | C11.1 12.45,44.2 11.9,44.74 11.9,46.01
  Bottom 0.203: v19.53,56.52 16.51,53.5 J3.1
DOUT  (via drill 0.35)
  Top 0.203: v32.23,48.9 33.81,47.31 33.81,46.51 IC1.41
  Route15 0.203: v32.23,48.9 25.08,48.9 17.3,56.67 15.4,56.67 11.75,60.33 v11.75,64.45
  Bottom 0.203: v11.75,64.45 11.27,64.93 11.27,66.99 MOLEX20.6
EN12  (via drill 0.35)
  Top 0.203: v42.86,39.37 42.55,39.69 41.43,39.69 IC1.27
  Route2 0.203: v42.86,39.37 45.4,39.37 72.23,66.2 77.63,66.2 SAM_CONN.P$17
EN_AN  (via drill 0.35)
  Top 0.381: IC1.11 23.43,36.64 v23.37,36.58
  Route15 0.381: v23.37,36.58 5.84,36.58 3.81,38.61 3.81,71.63 6.35,74.17 40.08,74.17 41.09,73.16 41.78,73.16 43.28,74.66 78.24,74.66 v80.52,72.39
  Bottom 0.203: R18.1 88.9,73.18 85.88,73.18 85.88,68.74 84.14,66.99 83.03,66.99 83.03,73.66 R17.1
  Bottom 0.381: R17.1 81.03,73.66 | 81.03,73.66 R16.1 | v80.52,72.39 80.52,73.15 81.03,73.66
EN_VBAT  (via drill 0.35)
  Top 0.203: v53.82,45.88 53.82,45.56 51.44,43.18 41.43,43.18 IC1.31
  Route2 0.203: v53.82,45.88 53.82,46.83 72.71,65.72 79.69,65.72 SAM_CONN.P$19
ESRDTFYGHUJI  (via drill 0.35)
  Top 0.203: v72.87,60.64 v62.87,60.64
  Bottom 0.203: v62.87,60.64 62.87,58.58 62.71,58.42 R8.1 | v72.87,60.64 76.36,60.64 76.36,59.69 Q4.C
FAN_A  (via drill 0.35)
  Top 0.203: v55.09,50.17 40.16,50.17 37.31,47.31 37.31,46.51 IC1.37
  Route15 0.203: v55.09,50.17 56.52,50.17 SAM_CONN.P$13
FAN_B  (via drill 0.35)
  Top 0.203: v53.02,51.12 40.32,51.12 36.51,47.31 36.51,46.51 IC1.38 | v53.66,58.58 57.91,58.58 65.37,66.04 69.85,66.04 SAM_CONN.P$11
  Bottom 0.203: v53.02,51.12 53.66,51.75 v53.66,58.58
GND  (via drill 0.35)
  Top 0.508: v82.55,12.45 84.49,12.45 S3.1
  Route2 0.381: v18.13,41.43 18.13,43.78 v18.29,43.94 | v16.26,68.58 v22.1,68.58
  Bottom 0.381: 27.78,21.78 Q1.NC 28.1,21.4 v28.1,9.08 27.94,9.08 27.94,7.33 U2.6 | 43.34,7.33 U4.6 43.37,7.34 v43.37,9.21 | v50.99,8.95 50.99,7.37 50.96,7.33 U3.6 | 34.61,38.26 34.61,40.48 U5.3 35.55,40.66 35.56,40.64 U5.2 U5.5 35.56,45.21 35.81,45.47 v35.81,48.51 | 34.61,38.26 34.61,36.83 C1.2 34.61,36.67 34.61,29.65 40.51,23.75 | 41.12,25.4 C5.2 41.01,23.88 | 35.72,7.33 U6.6 35.7,8.2 v36.42,8.92 43.24,15.75 44.2,15.75 | 16.19,68.58 16.19,68.9 | 16.19,68.9 15.4,69.69 9.84,69.69 8.41,68.26 8.41,67.31 8.26,67.15 MOLEX20.3 | 16.19,68.33 16.19,67.15 MOLEX20.11 | 16.19,68.33 16.19,68.58 | MOLEX20.11 16.03,67.15 15.24,67.15 MOLEX20.10 16.9,67.03 17.02,67.15 | 17.02,67.15 16.35,67.15 MOLEX20.11 | 17.02,67.15 17.14,67.15 MOLEX20.12 | v30.96,56.52 30.96,66.04 C24.2 30.8,66.2 26.83,66.2 26.83,67.31 25.56,68.58 22.61,68.58 | 22.22,68.58 22.61,68.58 | 22.22,68.33 22.22,67.15 MOLEX20.17 22.22,66.99 22.22,42.23 21.59,41.59 C27.2 21.43,41.43 v18.13,41.43 | 22.22,68.58 22.22,68.33 | 22.22,68.58 v22.1,68.58 21.84,68.58 22.1,68.33 22.22,68.33 | 16.51,68.58 v16.26,68.58 16.19,68.58 | J2.3 7.62,28.96 5.78,30.8 R1.1 3.65,30.8 2.54,31.91 2.54,44.2 4.06,45.72 J1.3 | v34.45,38.26 34.61,38.26 | 88.9,23.21 89.85,24.16 89.85,32.39 88.74,33.5 NUC_CONN.8 88.58,33.66 86.68,35.56 NUC_CONN.5 | 88.9,23.21 82.39,23.21 MOLEX10.4 | 88.9,23.21 88.9,12.92 | 88.9,12.92 88.9,12.41 | 88.9,12.41 88.9,11.94 | 88.9,11.94 S2.1 | 88.9,12.41 88.61,12.41 | 82.55,12.41 65.06,12.41 61.6,8.95 v61.6,8.35 61.6,6.44 U8.6 | Q4.NC 83.03,54.13 86.36,54.13 USB.1 86.52,54.13 87.15,54.13 87.95,54.93 87.95,64.93 Q5.NC 87.79,65.09 | C28.2 v46.99,19.56 44.7,19.56
  Bottom 0.381: SAM_CONN.P$1 59.02,66.71 59.02,57.02 60.61,55.44 60.61,51.47 59.63,50.48 U1.7 58.42,50.48 57.63,50.48 55.72,52.39 | 66.43,48.42 66.04,48.42 U1.25 65.89,47.95 65.88,47.94 U1.26 66.43,48.42 | C3.2 55.09,58.42 55.72,57.79 55.72,52.39 | U7.11 46.17,69.85 47.59,71.28 48.01,71.28 | U1.21 66.04,51.12 v67.31,51.12 | v67.31,51.12 67.41,51.12 67.41,49.15 66.67,48.42 66.43,48.42 | Q3.NC 50.96,71.28 48.77,71.28 | 48.01,71.28 48.39,71.28 | 48.39,71.28 48.77,71.28 | 48.39,70.9 48.39,62.45 50.8,60.04 C6.- | 48.39,70.9 48.39,71.28 | v55.91,52.32 55.72,52.32 55.72,52.39 | 60.52,41.91 C22.2 v58.17,41.91 | 44.2,15.75 C20.2 | 88.9,12.92 88.53,12.56 88.39,12.41 | 88.39,12.41 88.87,11.94 88.9,11.94 | 48.01,71.28 48.39,70.9 | 48.39,70.9 48.77,71.28 | 40.51,23.75 40.89,23.37 | 41.01,23.88 41.01,23.48 40.89,23.37 | 40.89,23.37 44.2,20.07 | 44.2,20.07 44.2,19.56 | 44.2,19.56 44.2,19.05 | 44.2,19.05 44.2,15.75 | 44.7,19.56 44.2,19.56 | 44.2,19.05 44.7,19.56 | 44.2,20.07 44.7,19.56 | 40.51,23.75 40.64,23.88 41.01,23.88 | v67.31,51.12 67.31,52.58 66.8,53.09 66.08,53.09 66.03,53.07 65.98,53.09 U1.18 | 16.19,68.9 16.51,68.58 | 16.19,68.33 16.26,68.33 16.51,68.58 | 22.22,68.33 22.35,68.33 22.61,68.58 | v88.65,12.45 88.61,12.41 | 88.61,12.41 88.39,12.41
  Bottom 0.508: v82.55,12.45 82.91,12.45 83,12.35 88.33,12.35 88.53,12.56
  pour Top: 2.03,27.18 3.05,26.16 18.54,26.16 26.42,18.29 26.42,3.56 28.7,1.27 86.61,1.27 89.66,4.32 89.66,70.87 86.11,74.42 3.81,74.42 2.03,72.64
  pour Bottom: 44.45,14.22 45.72,14.22 45.97,14.48 45.97,17.02 45.72,17.27 43.69,17.27 43.43,17.02 43.43,14.48 43.69,14.22
  pour Bottom: 87.88,23.88 87.88,22.86 88.14,22.61 89.15,22.61 89.41,22.61 89.66,22.86 89.66,23.88 89.41,24.13 88.14,24.13
GP_OUT  (via drill 0.35)
  Top 0.203: v21.27,50.48 28.57,43.18 29.69,43.18 IC1.3
  Bottom 0.203: v21.27,50.48 21.27,66.99 MOLEX20.16
I5  (via drill 0.35)
  Top 0.203: v40.32,32.54 38.74,32.54 37.31,33.97 37.31,34.77 IC1.19
  Bottom 0.203: v40.32,32.54 40.32,34.29 40.01,34.61 40.01,65.72 39.69,66.04 | 39.69,66.04 39.69,67.31 U7.2 | 39.69,66.04 U7.1
I5M  (via drill 0.35)
  Route15 0.203: v41.28,69.22 48.48,69.22 50.48,71.22 79.91,71.22 SAM_CONN.P$20
  Bottom 0.203: U7.3 41.28,68.58 v41.28,69.22
I12  (via drill 0.35)
  Top 0.203: 38.1,34.92 IC1.20
  Top 0.254: 38.1,34.92 38.1,35.72 38.42,36.04 40.32,36.04 40.64,35.72 v42.07,35.72
  Bottom 0.203: v42.07,35.72 42.07,71.28 43.82,73.03 | U7.8 43.82,73.03 | 43.82,73.03 U7.9
I12M  (via drill 0.35)
  Top 0.203: v55.72,72.07 v46.2,72.07
  Bottom 0.203: U7.10 46.2,71.12 v46.2,72.07 | v55.72,72.07 65.72,72.07 66.04,72.39 78.74,72.39 SAM_CONN.P$18
I24  (via drill 0.35)
  Top 0.203: v39.53,33.34 38.89,33.97 38.89,34.77 IC1.21
  Bottom 0.203: v39.53,33.34 39.53,64.29 37.15,66.68 37.15,71.28 38.89,73.03 | 38.89,73.03 39.53,73.66 U7.7 | 38.89,73.03 39.53,72.39 U7.6
I24M  (via drill 0.35)
  Top 0.203: v41.43,73.98 67.63,73.98 70.48,71.12 74.93,71.12 SAM_CONN.P$16
  Bottom 0.203: U7.5 41.43,71.12 v41.43,73.98
ICSPCLK  (via drill 0.35)
  Top 0.254: U11.12 76.71,4.06 75.95,4.83 71.12,4.83 v69.34,3.05
  Route2 0.254: J4.5 19.81,29.46 32.51,16.76 32.51,8.89 39.62,1.78 68.07,1.78 v69.34,3.05
ICSPDAT  (via drill 0.35)
  Top 0.254: U11.13 77.98,4.06 76.45,5.59 70.61,5.59 v69.34,4.32
  Route2 0.254: J4.4 22.35,28.45 35.31,15.49 35.31,7.87 40.13,3.05 68.07,3.05 v69.34,4.32
INT  (via drill 0.35)
  Top 0.203: v63.02,4 63.5,4 65.09,5.59 R32.1
  Bottom 0.203: v63.02,4 61.12,4 60.64,4.48 60.64,4.64 60.48,4.79 U8.2
INT_LUZ  (via drill 0.35)
  Top 0.203: v20.48,52.39 28.89,43.97 29.69,43.97 IC1.2
  Bottom 0.203: v20.48,52.39 20.32,52.55 20.32,66.99 MOLEX20.15
LED1  (via drill 0.35)
  Top 0.203: v33.18,44.13 33.18,46.36 IC1.42
  Bottom 0.203: v33.18,44.13 28.26,44.13 27.62,44.77 27.62,62.71 24.29,66.04 24.29,66.99 MOLEX20.19
LED2  (via drill 0.35)
  Top 0.203: v32.38,44.93 32.38,46.36 IC1.43
  Bottom 0.203: v32.38,44.93 29.53,47.78 29.53,62.71 25.24,66.99 MOLEX20.20
MCLK  (via drill 0.35)
  Top 0.381: U11.8 71.63,2.46 71.2,2.03 69.09,2.03 68.07,3.05 68.07,9.14 69.09,10.16 v69.85,10.16
  Route15 0.203: v12.22,65.41 11.59,65.41 10.95,64.77 10.95,53.02 41.69,22.29
  Route15 0.254: 41.69,22.29 67.37,22.29 69.85,19.81 v69.85,10.16
  Bottom 0.203: v12.22,65.41 12.22,66.99 MOLEX20.7
MCLR  (via drill 0.35)
  Top 0.203: R20.1 49.53,21.15 45.72,21.15 C8.1 | 26.19,18.76 v26.19,5.75 | 36.36,29.14 36.58,28.92 | 36.35,28.92 36.36,28.93 36.36,29.39 36.83,28.92 | 26.45,19.02 25.94,19.02 25.91,19.05 | 25.78,19.18 26.54,19.18 26.57,19.14
  Top 0.254: J1.1 6.35,38.61 25.78,19.18 25.91,19.05 26.19,18.76 26.45,19.02 26.57,19.14 36.35,28.92 36.58,28.92 36.83,28.92 44.74,28.92 45.72,27.94 C8.1 | IC1.18 36.36,29.39
  Bottom 0.203: v26.19,5.75 26.19,1.94 88.11,1.94 88.9,2.73 S2.2
MCLR_2  (via drill 0.35)
  Top 0.203: v73.98,19.56 84.14,19.56 85.09,18.61 S3.2 87.47,16.07 87.47,7.78
  Top 0.254: U11.4 75.44,6.6 75.88,6.16 R14.1 86.93,6.16 87.47,6.7 87.47,7.78
  Route2 0.203: v73.98,19.56 58.67,19.56 v58.58,19.56
  Route2 0.254: J4.1 33.02,28.96 49.28,28.96 58.67,19.56
  Bottom 0.203: v58.58,19.56 C28.1
N$1  (via drill 0.35)
  Top 0.203: v72.07,58.1 72.07,59.69 D1.2 | v72.23,49.85 72.23,48.74 R12.1
  Bottom 0.381: v72.23,49.85 73.98,49.85 74.93,50.8 74.93,57.15 73.98,58.1 v72.07,58.1
N$2  (via drill 0.35)  (1 unrouted)
  Top 0.254: IC1.26 39.04,39.04 v38.61,38.61
  Route2 0.254: v38.61,38.61 38.99,38.99 38.99,40.62 37.62,41.99 37.62,43.46 46.23,52.07 53.26,52.07 67.31,66.12 67.31,68.07 67.82,68.58 74.93,68.58 SAM_CONN.P$15
N$4  (via drill 0.35)
  Top 0.203: v68.58,53.66 72.39,53.66 72.71,53.34 C4.1
  Bottom 0.203: v68.58,53.66 66.04,53.66 U1.17
N$5
  Top 0.203: D2.2 69.53,41.91 69.53,42.55 R13.1
N$6
  Bottom 0.203: R19.1 D3.1
N$7  (via drill 0.35)
  Top 0.203: v24.77,23.05 24.7,23.05 R4.1
  Bottom 0.203: Q1.A 24.77,22.73 v24.77,23.05
N$8  (via drill 0.35)
  Top 0.203: v26.99,18.45 33.97,18.45 35.4,17.02 BUZZ1.P$2
  Bottom 0.203: 26.99,19.4 26.67,19.72 Q1.C | R3.P$1 35.56,24.13 35.56,17.02 BUZZ1.P$2
  Bottom 0.254: v26.99,18.45 26.99,19.4
N$9  (via drill 0.35)
  Route15 0.203: v66.52,55.88 85.72,55.88 86.36,55.25 USB.2
  Bottom 0.203: v66.52,55.88 66.52,55.56 66.04,55.09 U1.15
N$10
  Bottom 0.203: 12.7,30.64 J2.2
  Bottom 0.254: 12.7,30.64 R2.2
N$11
  Bottom 0.203: Q3.A 53.18,71.44 54.77,73.03 54.77,73.98 55.4,74.61 69.41,74.61 70.17,73.85 R16.2
N$12
  Bottom 0.203: U8.3 61.6,4.95 62.39,4.95 U8.4
N$13
  Bottom 0.203: U1.16 66.04,54.45 67.31,54.45 67.31,70.17 68.26,71.12 72.39,71.12 72.39,66.99 75.88,63.5 84.93,63.5 84.93,57.47 85.88,56.52 86.36,56.52 USB.3
N$28  (via drill 0.35)
  Top 0.203: v58.58,17.02 56.36,17.02 55.09,15.75 C21.1 | 63.66,18.29 Y1.2
  Top 0.254: U11.2 77.98,11.94 70.36,19.56 64.93,19.56 63.66,18.29
  Route2 0.203: v58.58,17.02 62.23,17.02 63.5,18.29 Y1.2
N$29
  Top 0.203: 68.42,18.29 Y1.1 68.58,18.29
  Top 0.254: C25.1 68.33,11.52 | 68.33,11.52 68.58,11.52 | 68.58,11.52 68.83,11.52 | 68.83,11.52 75.6,11.52 76.71,10.41 U11.3 | Y1.1 68.58,18.19 68.58,11.77 | 68.58,11.77 68.58,11.52 | 68.33,11.52 68.58,11.77 | 68.58,11.77 68.83,11.52
N$31  (via drill 0.35)
  Top 0.203: R15.1 64.29,34.29 v64.14,34.45 | v58.74,33.97 56.99,33.97 U9.3
  Route2 0.203: v64.14,34.45 59.21,34.45 v58.74,33.97
N$37
  Bottom 0.203: Q3.C 52.07,70.34 51.32,69.59 51.31,69.58
  Bottom 0.254: R6.1 49.78,68.06 51.32,69.59
N$38  (via drill 0.35)
  Top 0.203: v83.82,67.79 v78.74,62.71
  Bottom 0.203: Q4.A 78.74,60.96 v78.74,62.71 | v83.82,67.79 84.61,68.58 84.61,73.66 R17.2
N$39  (via drill 0.35)
  Top 0.203: v68.9,73.82 82.23,73.82 v86.68,69.37
  Bottom 0.203: R10.1 68.9,73.66 v68.9,73.82 | v86.68,69.37 88.9,67.15 Q5.C
N$40
  Bottom 0.203: Q5.A 89.85,65.09 89.85,70.48 R18.2
N$47  (via drill 0.35)
  Top 0.203: v52.55,5.91 52.29,5.65 v30.51,5.65
  Bottom 0.203: v52.55,5.91 55.72,5.91 55.72,5.59 U3.2 | 32.86,7.18 U2.1
  Bottom 0.381: U2.1 30.91,7.29 30.48,6.86 30.48,5.68 v30.51,5.65
N$48
  Bottom 0.203: U3.1 54.5,7.29 52.04,9.75 50.1,9.75 49.53,9.18 49.53,6.86 48.26,5.59 U4.2
N$49
  Bottom 0.203: U4.1 48.08,7.29 45.37,10 42.48,10 41.91,9.43 41.91,6.6 40.89,5.59 U6.2
NUC_SW  (via drill 0.35)
  Top 0.203: 29.84,38.89 IC1.8
  Top 0.254: v32.07,38.89 30.73,38.89 29.84,38.89
  Route15 0.203: 41.12,30.48 65.41,30.48 v65.72,30.8
  Route15 0.254: v32.07,38.89 32.7,38.89 41.12,30.48
  Bottom 0.203: v65.72,30.8 67.63,32.7 R5.1
POW_SW  (via drill 0.35)
  Top 0.203: v88.58,41.59 77.15,41.59 75.09,39.53 v73.98,39.53
  Bottom 0.203: v88.58,41.59 89.69,40.48 89.69,36.51 88.74,35.56 NUC_CONN.6 | v73.98,39.53 69.53,39.53 R5.2
POWER_LED_MAIN  (via drill 0.35)
  Top 0.254: v32.07,37.78 31.75,38.1 29.84,38.1 IC1.9
  Route15 0.203: 75.06,29.5 86.2,40.64 87.63,40.64 88.58,39.69 NUC_CONN.2
  Route15 0.254: v32.07,37.78 33.02,37.78 41.31,29.5 75.06,29.5
  Bottom 0.203: R19.2 87.79,46.51 87.79,40.48 88.58,39.69 NUC_CONN.2
RF2  (via drill 0.35)
  Top 0.203: v28.73,54.93 30,54.93 U10.3 | IC1.1 29.69,44.77 v28.73,45.72 19.84,54.61 13.65,54.61 9.87,50.83 | J1.5 9.84,50.8 9.87,50.83 | R23.2 9.97,50.73 9.87,50.83
  Bottom 0.203: v28.73,45.72 v28.73,54.93
RF3  (via drill 0.35)
  Top 0.203: 31.43,51.44 31.43,46.51 IC1.44 | 31.43,51.44 31.43,53.98 31.11,54.29 30.16,54.29 U10.2 | 31.43,51.44 v26.83,51.44 | R21.2 7.69,48.26 J1.4
  Route2 0.203: J1.4 9.53,51.44 v26.83,51.44
RGB_LED  (via drill 0.35)
  Top 0.254: IC1.14 33.27,34.73 33.27,33.97 32.64,33.34 v32.07,33.34
  Bottom 0.203: 33.97,7.97 34.29,7.65 34.29,6.86 33.02,5.59 U2.2
  Bottom 0.254: v32.07,33.34 33.97,31.43 33.97,7.97
RX1  (via drill 0.35)
  Top 0.203: v54.77,46.67 40.96,46.67 40.01,47.62 39.21,47.62 38.89,47.31 38.89,46.51 IC1.35
  Bottom 0.203: v54.77,46.67 58.42,46.67 U1.1
RXLED  (via drill 0.35)
  Top 0.203: v64.45,50.48 64.2,50.48 63.69,49.98 63.69,45.4 67.18,41.91 D2.1
  Bottom 0.203: v64.45,50.48 U1.22
SCL  (via drill 0.35)
  Top 0.203: 36.35,56.04 R25.1 36.35,56.04 | 36.35,56.04 35.08,57.31 30,57.31 26.99,54.29 25.88,54.29 U10.7 | v53.18,41.59 60.8,33.97 62.39,33.97 U9.14 | 36.35,56.04 v38.74,56.04
  Route15 0.203: v38.74,56.04 v53.18,41.59
SCL0  (via drill 0.35)
  Top 0.203: 37.78,71.91 44.93,71.91 45.88,72.87 65.56,72.87 SAM_CONN.P$10 69.85,68.58 71.44,68.58 72.39,67.63 72.39,66.99 76.83,62.55 v76.83,58.26 | 37.78,71.91 v36.67,71.91 | 56.83,32.7 U9.5 | v14.45,68.74 15.72,70.01 28.04,70.01 29.78,68.26 34.13,68.26 34.24,68.37 37.78,71.91
  Top 0.254: 56.83,32.7 51.53,32.7 v50.61,31.78 | R27.1 35.88,66.74 34.24,68.37
  Route15 0.203: v38.01,40.48 39.21,40.48
  Route15 0.254: v50.61,31.78 47.91,31.78 39.21,40.48
  Bottom 0.203: v36.67,71.91 36.67,66.36 37.56,65.47 37.56,40.93 v38.01,40.48 36.68,40.48 U5.1 36.51,40.8 | v14.45,68.74 14.45,67.31 14.29,67.15 MOLEX20.9 | 77.53,26.38 77.53,57.25 76.83,57.94 v76.83,58.26
  Bottom 0.254: 77.53,26.38 78.85,25.07 MOLEX10.2
SCL1  (via drill 0.35)  (1 unrouted)
  Top 0.203: 56.83,31.43 U9.7
  Top 0.254: 56.83,31.43 54.29,31.43 53.98,31.11 52.86,31.11 v52.07,31.91
  Route15 0.203: v21.27,46.51 37.47,46.51
  Route15 0.254: 37.47,46.51 v52.07,31.91
  Bottom 0.203: 15.24,52.55 v21.27,46.51 | 15.24,57.94 15.13,58.06 9.21,63.98 9.21,66.99 MOLEX20.4
  Bottom 0.381: 15.13,58.06 15.13,57.66 | 15.13,57.66 15.13,53.89 15.3,53.71 15.3,52.44 | R29.1 14.69,57.22 15.13,57.66
SCL2  (via drill 0.35)
  Top 0.203: 62.39,31.43 U9.10
  Top 0.254: v60.96,31.53 61.47,31.53 61.51,31.49 62.42,31.49 U9.10
  Route15 0.203: v19.53,65.41 25.88,65.41 32.86,58.42 32.86,58.26 59.6,31.53
  Route15 0.254: 59.6,31.53 v60.96,31.53
  Bottom 0.203: v60.96,31.53 60.64,31.21 60.64,6.54 60.48,6.38 U8.7 | v19.53,65.41 19.53,66.68 19.21,66.99 MOLEX20.14
  Bottom 0.381: MOLEX20.14 19.2,72.86 R31.1
SCL3  (via drill 0.35)
  Top 0.203: v64.14,33.34 63.5,32.7 62.55,32.7 U9.12
  Bottom 0.203: v64.14,33.34 64.93,34.13 64.93,46.04 63.66,47.31 63.66,62.48 63.66,64.93 SAM_CONN.P$7
  Bottom 0.381: R34.1 63.98,62.16 63.66,62.48
SDA  (via drill 0.35)
  Top 0.203: 29.69,57.79 26.83,54.93 25.88,54.93 U10.6 | v56.99,45.56 56.99,39.21 61.6,34.61 62.39,34.61 U9.15
  Top 0.254: 29.69,57.79 29.78,57.88 33.28,57.88 33.34,57.82 33.97,57.82 34.03,57.88 v36.51,57.88
  Route15 0.203: v36.51,57.88 45.82,57.88 47.43,56.26 v47.43,53.21 49.72,50.93 51.88,50.93 56.99,45.81 v56.99,45.56
  Bottom 0.203: v47.43,53.21 49.69,50.96 49.69,48.42 R22.1
SDA0  (via drill 0.35)
  Top 0.203: v33.66,58.58 20.8,58.58 v19.53,59.85 | v61.44,27.62 53.15,27.62 | 56.83,33.34 U9.4
  Top 0.254: 56.83,33.34 50.55,33.34 49.78,32.58 49.78,30.99 53.15,27.62
  Top 0.381: v33.66,58.58 35.88,60.8 R26.1
  Route2 0.203: v33.66,58.58 46.04,70.96 70.01,70.96 SAM_CONN.P$12
  Bottom 0.203: U5.6 36.51,43.42 36.86,43.77 36.86,55.37 v33.66,58.58 | v19.53,59.85 13.33,66.04 13.33,66.99 MOLEX20.8 | 78.99,22.54 67.02,22.54 61.94,27.62 v61.44,27.62 66.2,32.39 66.2,39.85 71.12,44.77 71.12,50.8 72.39,52.07 72.39,55.88 69.85,58.42 69.85,68.58 SAM_CONN.P$12
  Bottom 0.254: 78.99,22.54 80.5,24.05 MOLEX10.3
SDA1  (via drill 0.35)
  Top 0.203: v53.66,31.91 53.82,32.07 | 56.83,32.07 U9.6
  Top 0.254: 53.82,32.07 56.83,32.07
  Top 0.381: R28.1 16.95,60.84 v19.53,58.26
  Route15 0.203: v19.53,58.26 27.81,58.26
  Route15 0.254: 27.81,58.26 53.66,32.42 v53.66,31.91
  Bottom 0.203: v19.53,58.26 15.72,58.26 10.32,63.66 10.32,66.99 MOLEX20.5
SDA2  (via drill 0.35)
  Top 0.203: v59.05,28.42 60.17,28.42 62.39,30.64 U9.9
  Route15 0.203: v19.53,63.66 24.45,58.74 29.84,58.74 v52.55,36.04
  Bottom 0.203: U8.1 59.37,4.95 57.63,4.95 57.63,17.49 59.37,19.24 59.37,28.1 v59.05,28.42 59.05,29.53 v52.55,36.04 | v19.53,63.66 18.41,64.77 18.41,66.83 18.26,66.99 MOLEX20.13
  Bottom 0.381: R30.1 17.78,71.12 18.21,70.69 MOLEX20.13
SDA3  (via drill 0.35)
  Top 0.203: v64.14,32.07 62.55,32.07 U9.11
  Bottom 0.203: SAM_CONN.P$9 68.1,66.83 68.1,58.25 71.12,55.23 71.12,52.07 69.85,50.8 69.85,49.05 65.72,44.93 65.72,33.66 v64.14,32.07 61.46,32.07 61.26,32.26 61.21,32.26 60.96,32.52 60.96,36.83 61.79,37.66 R33.1
SPEAKER
  Top 0.203: 33.81,34.77 IC1.15
  Top 0.254: R4.2 29.91,28.7 32.77,28.7 33.81,29.75 33.81,34.77
TRIGGER_IN+  (via drill 0.35)
  Top 0.203: v28.26,42.39 29.69,42.39 IC1.4
  Bottom 0.203: v28.26,42.39 23.18,47.47 23.18,66.99 MOLEX20.18
TX1  (via drill 0.35)
  Top 0.203: v52.71,45.56 43.82,45.56 42.23,43.97 41.43,43.97 IC1.32
  Bottom 0.203: v52.71,45.56 52.71,49.21 58.42,49.21 U1.5
TXLED  (via drill 0.35)
  Top 0.203: v69.69,54.45 70.17,54.93 70.17,59.69 D1.1
  Route15 0.203: v64.45,49.37 64.61,49.53 68.58,49.53 69.85,50.8 69.85,54.29 v69.69,54.45
  Bottom 0.203: v64.45,49.37 64.93,49.85 65.88,49.85 U1.23
VBAT  (via drill 0.35)
  Top 0.203: 41.28,38.26 IC1.25
  Top 0.254: 41.28,38.26 40.35,38.26 38.99,36.89 v38.23,36.89
  Route2 0.203: v38.23,36.89 37.72,37.4 37.72,38.89 37.05,39.56 37.05,44.36 55.25,62.55 58.74,62.55 SAM_CONN.P$5
WAKE_UP  (via drill 0.35)
  Top 0.203: v38.61,42.29 38.1,42.8 38.1,46.36 IC1.36
  Top 0.381: v75.18,10.16 72.39,10.16 71.63,9.4 U11.7
  Route2 0.203: 38.61,42.04 v38.61,42.29
  Route2 0.254: 38.61,42.04 57.12,23.53 71.98,23.53 75.18,20.32 v75.18,10.16

## Text on the board
Bottom: PilotSCAN